# Altium PCB PCB_STM32F103C8.PcbDoc
Units mil, origin at the board's own origin, x right, y up, seen from the top; angles counter-clockwise.
Board outline 3937.01 x 3937.01 mil, 2 copper layers (Top Layer, Bottom Layer); 53 components, 63 nets, 231 pads, 105 vias.
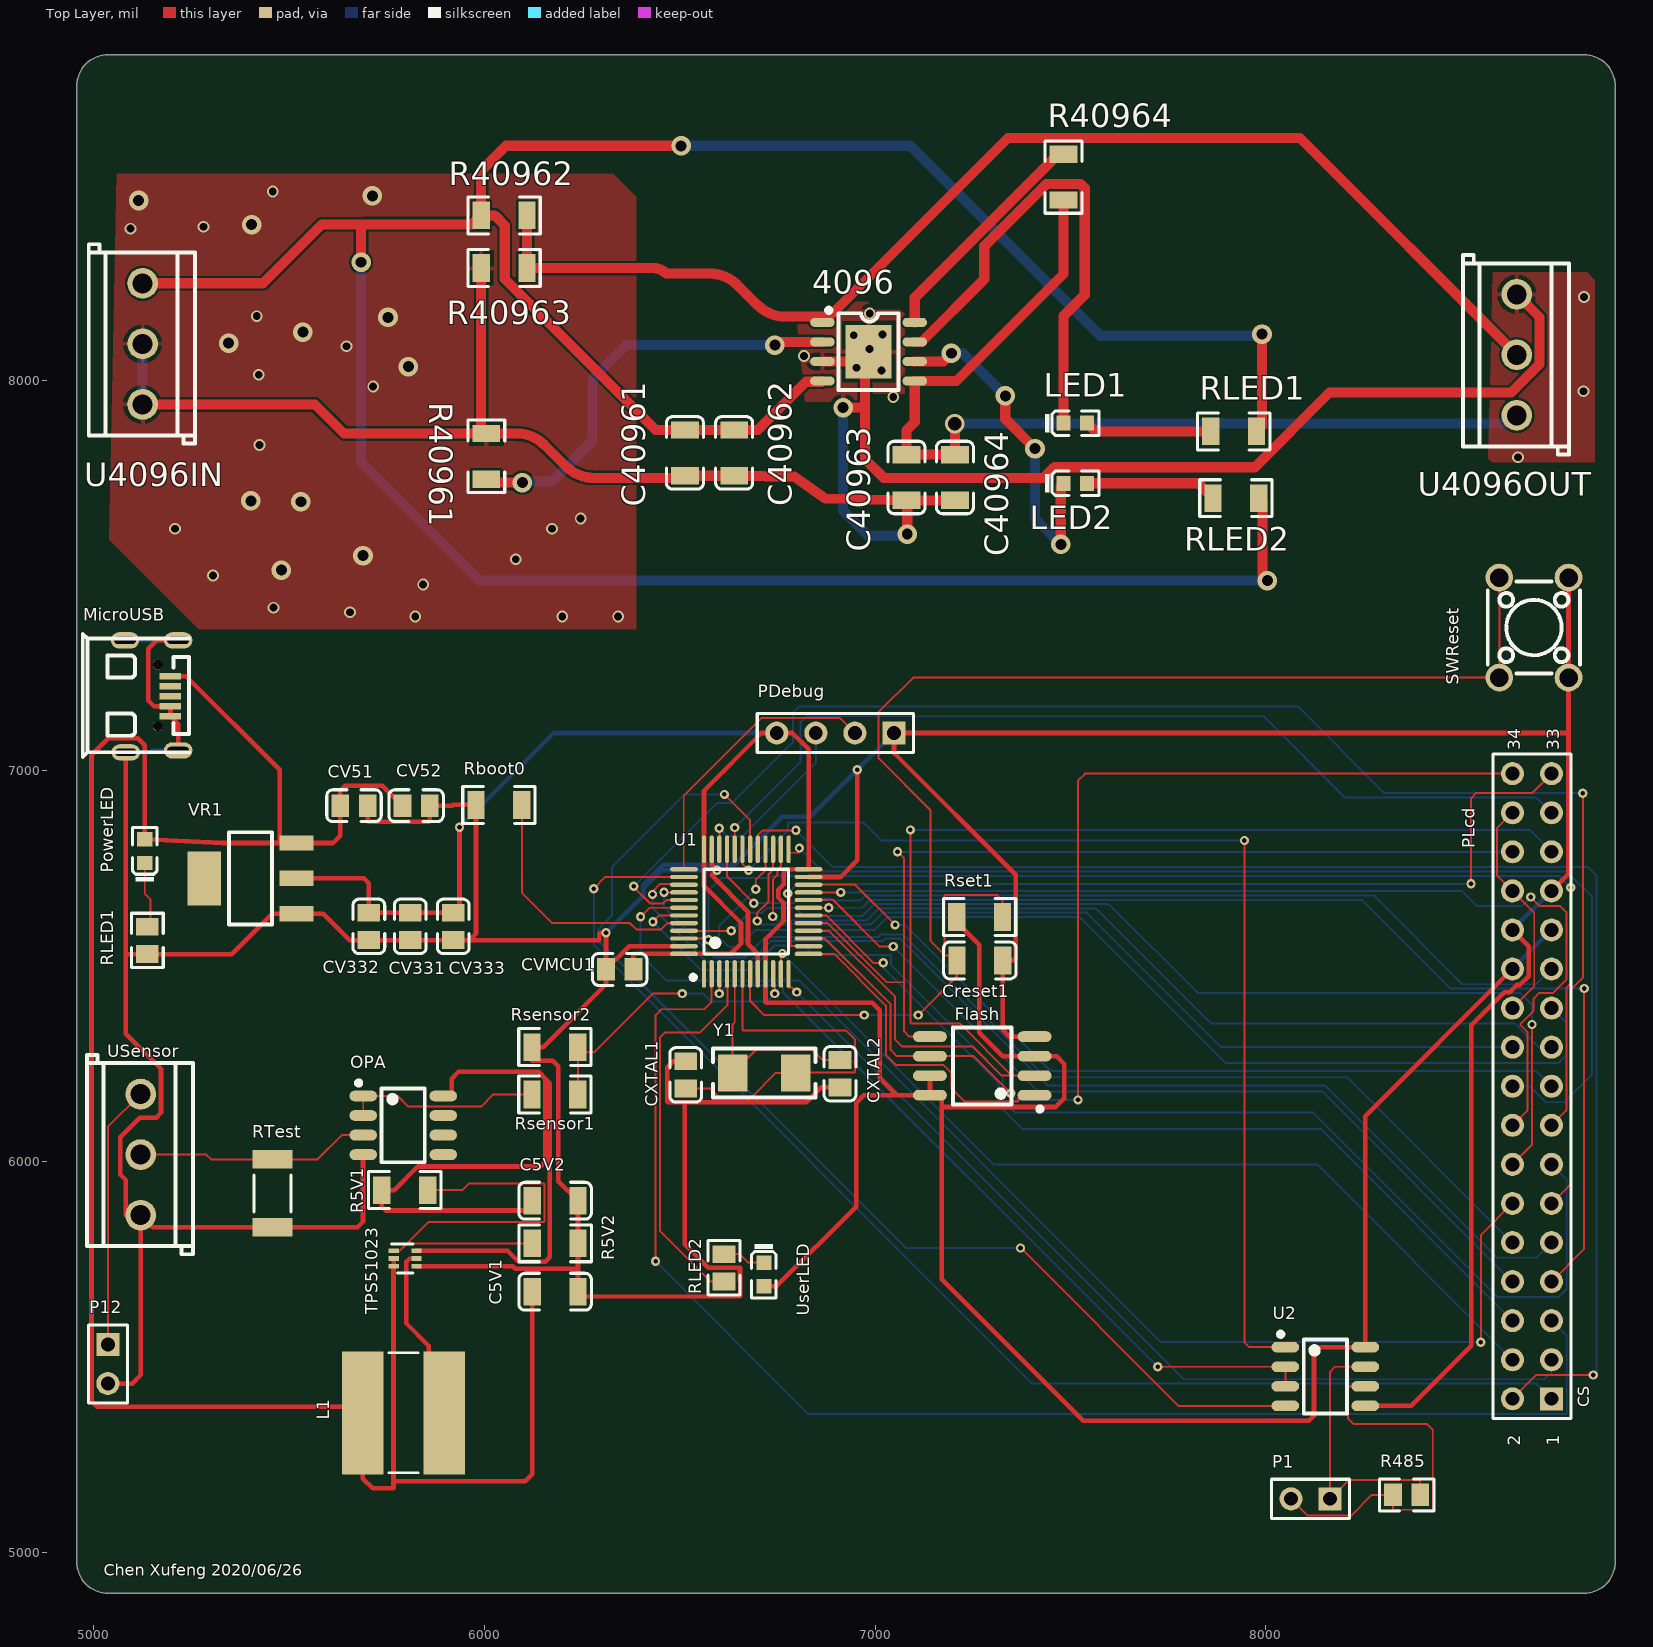
[diagram p0: Top Layer view]
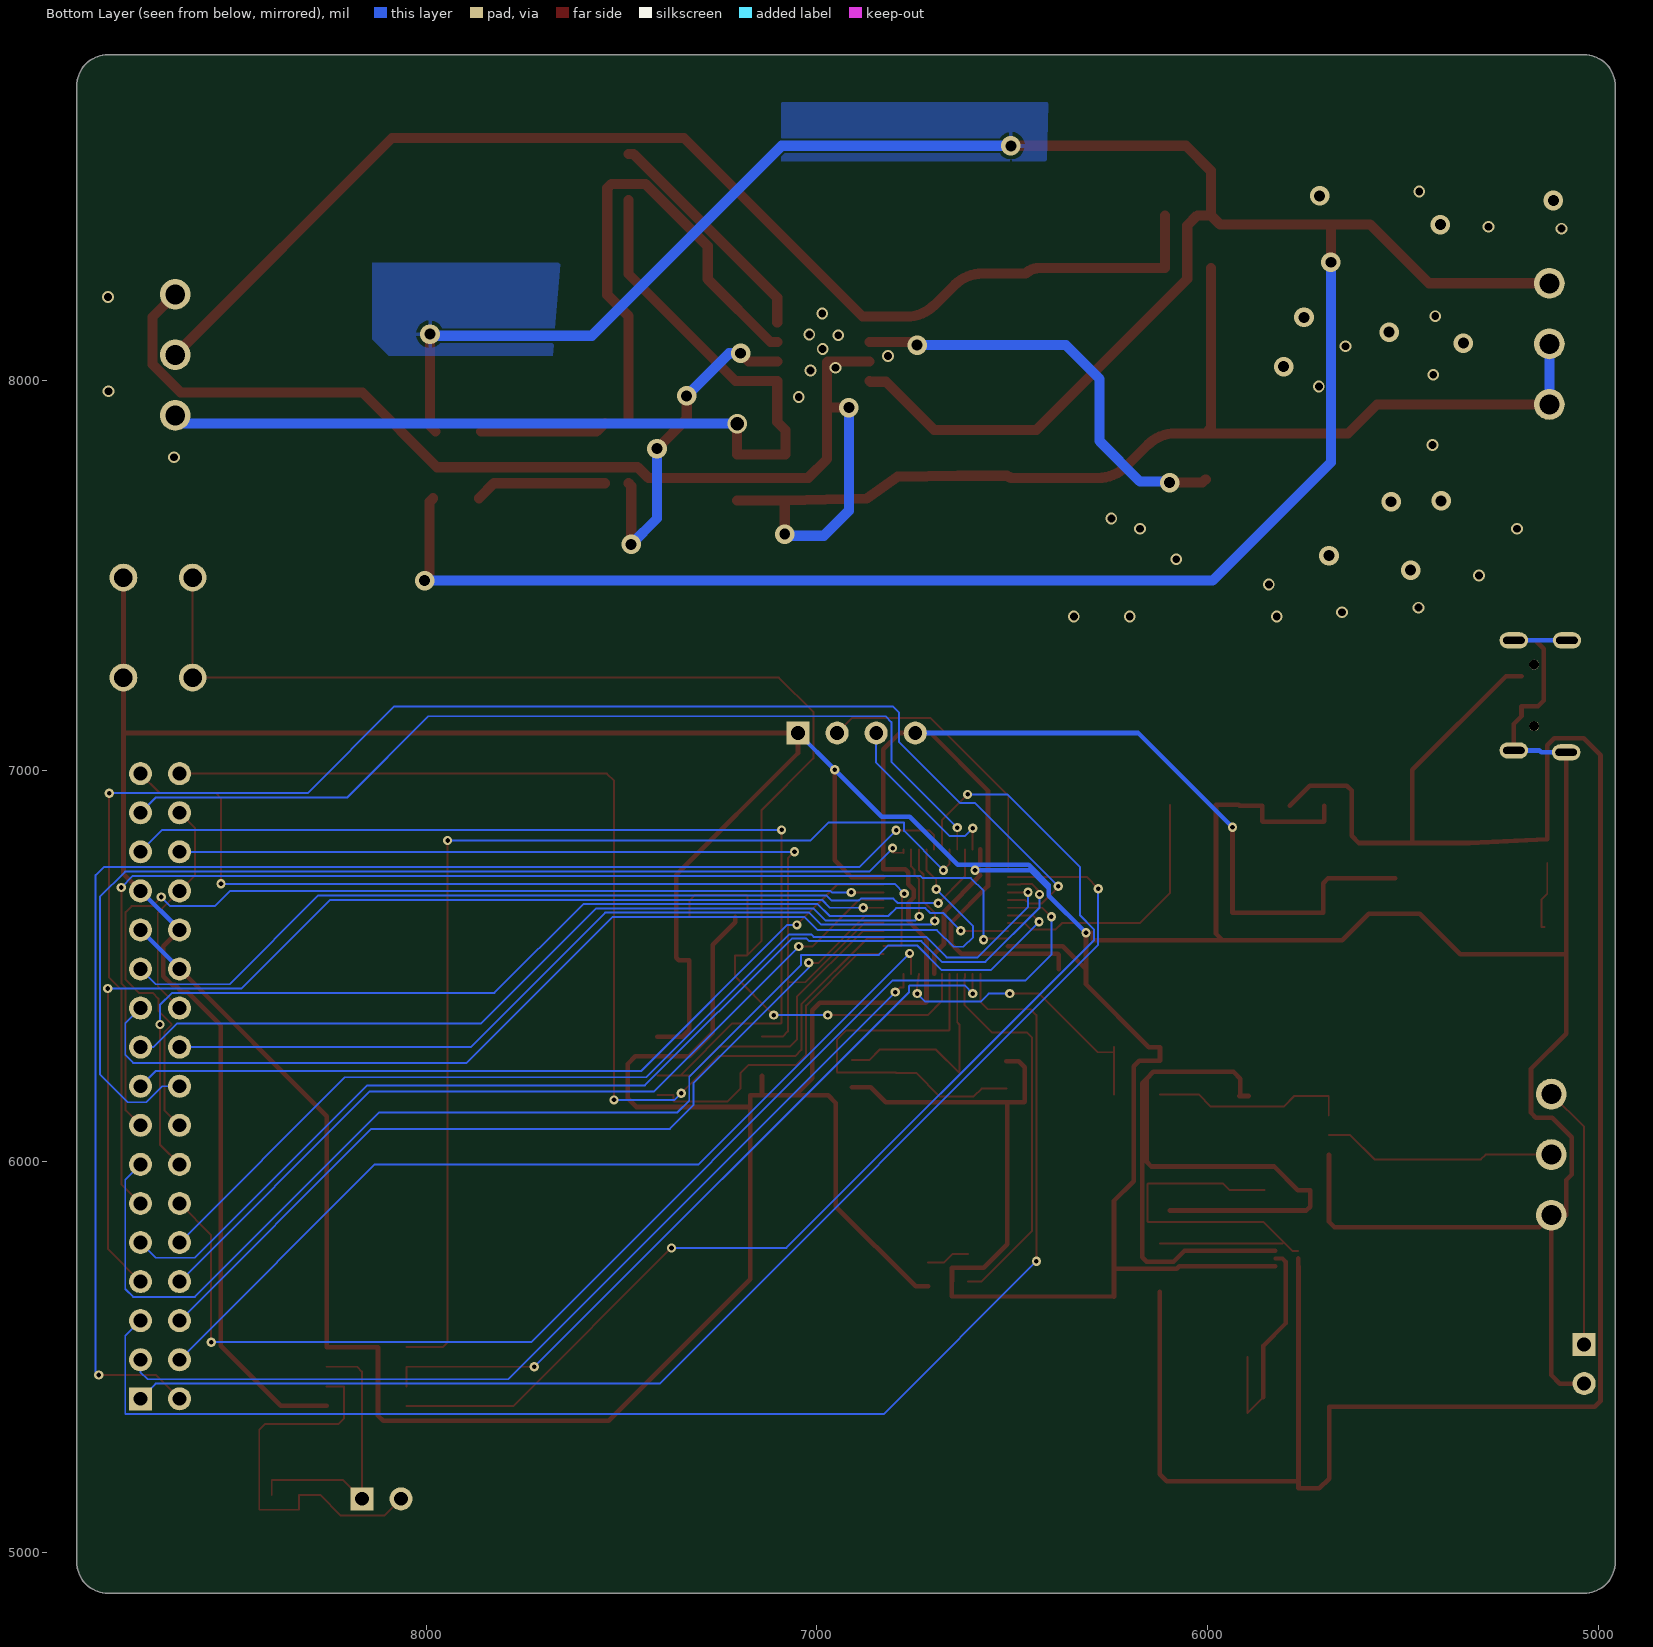
[diagram p1: Bottom Layer view, seen from below]
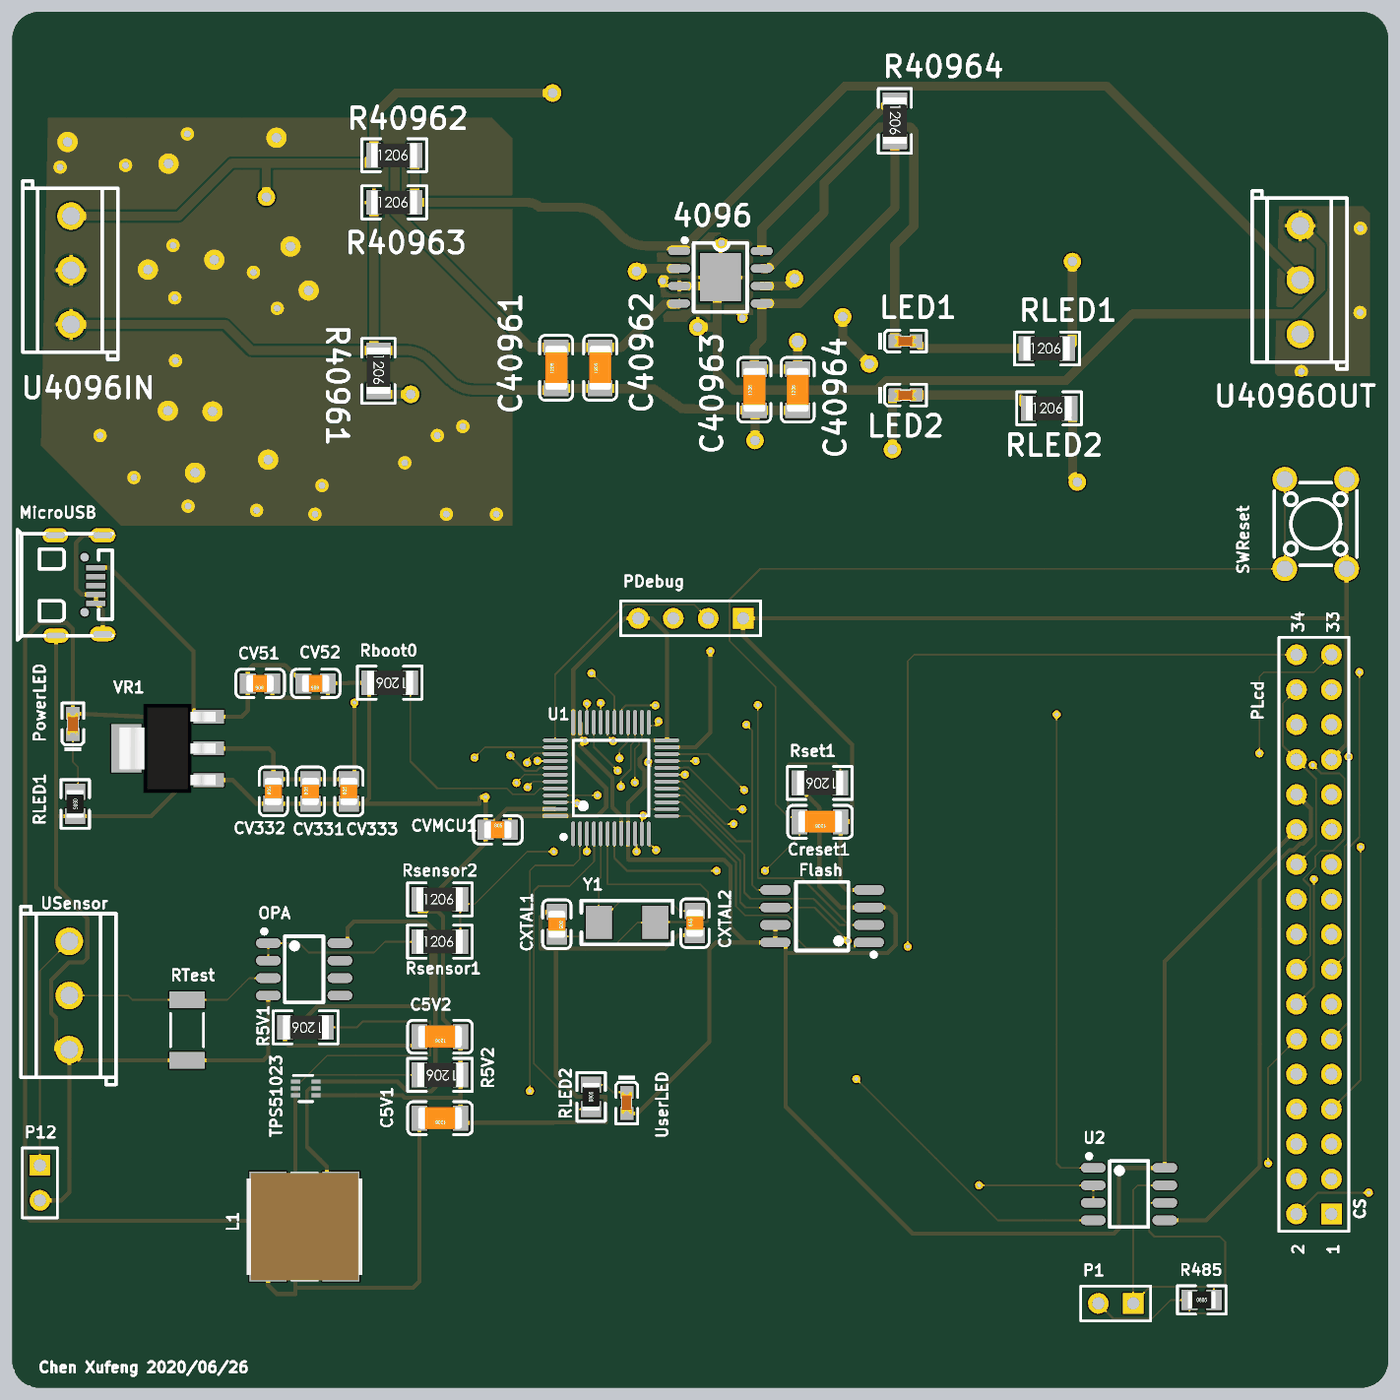
[diagram p2: 3D render of the assembled board from above, using the file's embedded part models]

## Layer stack, top to bottom
Top Solder: solder mask 0.4, Solder Resist, Dk 3.5
Top Layer: signal copper 1.4
Dielectric 1: dielectric 12.6, FR-4, Dk 4.8
Bottom Layer: signal copper 1.4
Bottom Solder: solder mask 0.4, Solder Resist, Dk 3.5

## Board outline
4956.74,4974.4 ccw(c5035.48,4974.4) 5035.48,4895.66 8815.01,4895.66 ccw(c8815.01,4974.4) 8893.75,4974.4 8893.75,8753.93 ccw(c8815.01,8753.93) 8815.01,8832.67 5035.48,8832.67 ccw(c5035.48,8753.93) 4956.74,8753.93

## Design rules (kind name [scope] priority, off if disabled: settings)
Clearance [All] p1: gap=6 ignorepadtopadclearanceinfootprint=FALSE
PolygonConnect [All] p1: connectstyle=Relief reliefconductorwidth=10 reliefentries=4 polygonreliefangle="90 Angle" airgapwidth=10
RoutingVias [All] p1: holewidth=11.81 width=23.62 viastyle="Through Hole" minholewidth=11.81 minwidth=23.62 maxholewidth=22.83 maxwidth=23.62
SolderMaskExpansion [All] p1: expansion=4
Width TC4056C [All] p1: maxlimit=31.5 minlimit=23.62 preferedwidth=25.98
Width Power [InNetClass('Power')] p2: maxlimit=39.37 minlimit=11.81 preferedwidth=11.81
Width [All] p3: maxlimit=50 minlimit=5 preferedwidth=5
30 further rules are at their usual default settings.

## Classes and differential pairs
net class "New Class": 4096_5V GND_4096 Net4096_2 Net4096_6 Net4096_7 Net4096_8
component class TC4056Charge: 4096 C40961 C40962 C40963 C40964 LED1 LED2 R40961 R40962 R40963 R40964 RLED1 RLED2 U4096IN U4096OUT
component class Sheet_STM32F103C8: Creset1 CV51 CV52 CV331 CV332 CV333 CVMCU1 CXTAL1 CXTAL2 Flash MicroUSB OPA P1 P12 PDebug PLcd PowerLED R485 Rboot0 RLED1 RLED2 Rsensor1 Rsensor2 Rset1 RTest SWReset U1 U2 USensor UserLED VR1 Y1
component class 3.3VTo5V: C5V1 C5V2 L1 R5V1 R5V2 TPS51023

## Components (designator, comment, footprint, x,y, rotation, side; value= is the part's Value field where it differs from the comment)
4096 "TC4056A" SOP-8_L4.9-W3.9-P1.27-LS6.0-BL-EP 6983,8073 r270 top
C5V1 "10uF (106) 10% 50V" 1206_C 6180.66,5667 r180 top
C5V2 "4.7uF (105) 10% 50V" 1206_C 6180.66,5900 r180 top
C40961 "1uF" 1206_C 6513,7814 r90 top
C40962 "0.1uF" 1206_C 6639,7814 r90 top
C40963 "0.1uF" 1206_C 7080,7751 r90 top
C40964 "0.1uF" 1206_C 7204,7751 r90 top
Creset1 "1uF" 1206_C 7268,6515 r180 top
CV51 "0.1uF 10% 50V" 0805_C 5665.96,6911 r180 top
CV52 "1uF 10% 50V" 0805_C 5824.96,6911 r180 top
CV331 "0.1uF 10% 50V" 0805_C 5810,6602.04 r90 top
CV332 "10uF 10% 50V" 0805_C 5704,6602.04 r90 top
CV333 "1uF 10% 50V" 0805_C 5920,6602.04 r90 top
CVMCU1 "4.7uF 10% 50V" 0805_C 6346.04,6492 r0 top
CXTAL1 "20pF 10% 50V" 0805_C 6515,6222 r270 top
CXTAL2 "20pF 10% 50V" 0805_C 6910,6225 r90 top
Flash "W25Q128JVSIQ" SOIC-8_208mil 7274,6245 r90 top
L1 "SDR0805-2R5ML" SDR0805 5793,5357 r0 top value=Value
LED1 "红灯 0603" 0603_LED_S1 7512,7890.11 r0 top
LED2 "蓝灯 0603" 0603_LED_S1 7512,7736.11 r0 top
MicroUSB "U254-051N-4BH806" MICRO-USB-SMD_U254-051N-4BH806 5148,7191 r270 top
OPA "LM358DR2G" SOIC-8_150mil 5792,6093 r270 top
P1 "Header 2" HDR1X2 8164.14,5137 r180 top
P12 "Header 2" HDR1X2 5036,5532 r270 top
PDebug "Header 4" HDR1X4 7048,7097 r180 top
PLcd "LCD" HDR2X17 8731,5393 r90 top
PowerLED "蓝灯 0603" 0603_LED_S1 5130.39,6794.68 r90 top
R5V1 "732KΩ (1001) ±1%" 1206_R 5796,5927 r180 top
R5V2 "100KΩ (1001) ±1%" 1206_R 6180.66,5791 r180 top
R485 "120ohm" 0805_R 8360,5147 r0 top
R40961 "2KΩ" 1206_R 6004.53,7805 r270 top
R40962 "0.1Ω" 1206_R 6050,8422 r0 top
R40963 "0.2Ω" 1206_R 6050,8287 r0 top
R40964 "1KΩ" 1206_R 7482,8520 r270 top
Rboot0 "100KΩ" 1206_R 6037,6913 r180 top
RLED1 "1KΩ" 1206_R 7917.34,7869 r0 top
RLED1 "100KΩ" 0805_R 5137,6566.04 r270 top
RLED2 "1KΩ" 1206_R 7923.34,7698 r0 top
RLED2 "330Ω" 0805_R 6613,5727.99 r90 top
Rsensor1 "17.4KΩ ±1%" 1206_R 6180.34,6172 r0 top
Rsensor2 "33KΩ  ±1%" 1206_R 6180.34,6293 r0 top
Rset1 "100KΩ" 1206_R 7267,6626 r180 top
RTest "250ohm ±0.1%" 12Z-2010 5457,5919 r90 top
SWReset "Key" SW-TH_4P-L6.0-W6.0-P4.50-LS6.5 8686,7367 r90 top
TPS51023 "TPS61023DRLR" DRL0006A 5797,5752 r0 top value=Value
U1 "STM32F103C8T6" LQFP-48_7x7x05P 6670,6640 r0 top
U2 "SIT485EESA" SOIC-8_150mil 8152,5450 r270 top
U4096IN "KF396-3.96-3P" CONN-TH_3P-P3.96_KF396-3.96-3P 5125,8093 r90 top
U4096OUT "KF396-3.96-3P" CONN-TH_3P-P3.96_KF396-3.96-3P 8642,8065 r90 top
USensor "KF396-3.96-3P" CONN-TH_3P-P3.96_KF396-3.96-3P 5120,6018 r90 top
UserLED "RED 0603" 0603_LED_S1 6715,5711 r270 top
VR1 "AMS1117-3.3" SOT-223 5401,6725 r0 top
Y1 "8MHz ±20ppm 20pF" SMD-5032_2P 6716,6227 r180 top

## Footprints (in the part's own frame and the unit in brackets; to place one, negate y for a bottom-side part, rotate by r counter-clockwise, add the part's x,y. Pads: shape width x height; smd on the part's side, far side on the other; paste and mask are expansions set on the pad)
12Z-2010 [mm] "Chip Resistor, Body 5.0x2.5mm, IPC High Density"
  rect 1.2x2.6 smd: 1(-2.2,0) 2(2.2,0)
  silkscreen extent -1.2,-1.2 1.2,1.2, body extent -2.58,-1.33 2.58,1.33, height 0.9
0603_LED_S1 [mm]
  rect 0.93x0.98 smd: A(0.77,0) K(-0.77,0)
  silkscreen extent -1.98,-0.79 1.54,0.79, body extent -0.8,-0.4 0.8,0.4, height 0.6
0805_C [mm]
  rect 1.16x1.47 smd: 1(-0.89,0) 2(0.89,0)
  silkscreen extent -1.77,-1.04 1.77,1.04, body extent -1,-0.62 1,0.63, height 0.77
0805_R [mm]
  rect 1.16x1.47 smd: 1(-0.89,0) 2(0.89,0)
  silkscreen extent -1.77,-1.03 1.77,1.03, body extent -1,-0.62 1,0.63, height 0.49
1206_C [mm]
  rect 1.13x1.8 smd: 1(-1.49,0) 2(1.49,0)
  silkscreen extent -2.36,-1.2 2.36,1.2, body extent -1.6,-0.81 1.6,0.79, height 1
1206_R [mm]
  rect 1.13x1.8 smd: 1(-1.49,0) 2(1.49,0)
  silkscreen extent -2.35,-1.2 2.35,1.2, body extent -1.7,-0.86 1.65,0.87, height 0.85
CONN-TH_3P-P3.96_KF396-3.96-3P [mm]
  round 2 hole 1.3: 1(-3.937,0) 2(0,0) 3(3.937,0)
  silkscreen extent -6.48,-3.4 6.48,3.5
DRL0006A [mm]
  rect 0.67x0.3 smd paste+0 mask+0: 1(-0.74,0.5) 2(-0.74,0) 3(-0.74,-0.5) 4(0.74,-0.5) 5(0.74,0) 6(0.74,0.5)
  silkscreen extent -0.9,-0.95 0.5,0.95, body extent 0,0 0.25,0.25, height 0.25
HDR1X2 [mm] "Connector; Header; 2 Position"
  rect 1.5x1.5 hole 0.9: 1(0,0)
  round 1.5 hole 0.9: 2(2.54,0)
  silkscreen extent -1.27,-1.27 3.81,1.27
HDR1X4 [mm] "Connector; Header; 4 Position"
  rect 1.5x1.5 hole 0.9: 1(0,0)
  round 1.5 hole 0.9: 2(2.54,0) 3(5.08,0) 4(7.62,0)
  silkscreen extent -1.27,-1.27 8.89,1.27
HDR2X17 [mm] "Connector; Header; 17x2 Position"
  rect 1.5x1.5 hole 0.9: 1(0,0)
  round 1.5 hole 0.9: 2(0,2.54) 3(2.54,0) 4(2.54,2.54) 5(5.08,0) 6(5.08,2.54) 7(7.62,0) 8(7.62,2.54) 9(10.16,0) 10(10.16,2.54) 11(12.7,0) 12(12.7,2.54) 13(15.24,0) 14(15.24,2.54) 15(17.78,0) 16(17.78,2.54) 17(20.32,0) 18(20.32,2.54) 19(22.86,0) 20(22.86,2.54) 21(25.4,0) 22(25.4,2.54) 23(27.94,0) 24(27.94,2.54) 25(30.48,0) 26(30.48,2.54) 27(33.02,0) 28(33.02,2.54) 29(35.56,0) 30(35.56,2.54) 31(38.1,0) 32(38.1,2.54) 33(40.64,0) 34(40.64,2.54)
  silkscreen extent -1.27,-1.27 41.91,3.81
LQFP-48_7x7x05P [mm]
  oval 0.28x1.8 smd mask+0.051: 1(-2.75,-4.05) 2(-2.25,-4.05) 3(-1.75,-4.05) 4(-1.25,-4.05) 5(-0.75,-4.05) 6(-0.25,-4.05) 7(0.25,-4.05) 8(0.75,-4.05) 9(1.25,-4.05) 10(1.75,-4.05) 11(2.25,-4.05) 12(2.75,-4.05) 25(2.75,4.05) 26(2.25,4.05) 27(1.75,4.05) 28(1.25,4.05) 29(0.75,4.05) 30(0.25,4.05) 31(-0.25,4.05) 32(-0.75,4.05) 33(-1.25,4.05) 34(-1.75,4.05) 35(-2.25,4.05) 36(-2.75,4.05)
  oval 1.8x0.28 smd mask+0.051: 13(4.05,-2.75) 14(4.05,-2.25) 15(4.05,-1.75) 16(4.05,-1.25) 17(4.05,-0.75) 18(4.05,-0.25) 19(4.05,0.25) 20(4.05,0.75) 21(4.05,1.25) 22(4.05,1.75) 23(4.05,2.25) 24(4.05,2.75) 37(-4.05,2.75) 38(-4.05,2.25) 39(-4.05,1.75) 40(-4.05,1.25) 41(-4.05,0.75) 42(-4.05,0.25) 43(-4.05,-0.25) 44(-4.05,-0.75) 45(-4.05,-1.25) 46(-4.05,-1.75) 47(-4.05,-2.25) 48(-4.05,-2.75)
  silkscreen extent -3.6,-4.42 2.75,2.75
MICRO-USB-SMD_U254-051N-4BH806 [mm]
  rect 0.4x1.4 smd: 1(-1.3,1.225) 2(-0.65,1.225) 3(0,1.225) 4(0.65,1.225) 5(1.3,1.225)
  oval 1.05x1.849 hole 0.45 slot 1.4 at 90 deg: 6(-3.64,1.725) 7(-3.64,-1.725) 8(3.52,1.725) 9(3.64,-1.675)
  round 0.65 hole 0.65 unplated: ""(-2.06,0.405) ""(1.94,0.405)
  silkscreen extent -4.06,-4.48 3.94,2.42
SDR0805 [mil]
  rect 106.5x315 smd: 1(-104.25,0) 2(104.25,0)
  silkscreen extent -38,-154 38,154, body extent -166,-154 166,154, height 221
SMD-5032_2P [mm]
  rect 1.9x2.4 smd: 1(-2.05,0) 2(2.05,0)
  silkscreen extent -3.33,-1.6 3.33,1.6
SOIC-8_150mil [mm]
  oval 0.7x1.8 smd: 1(-1.905,-2.6) 2(-0.635,-2.6) 3(0.635,-2.6) 4(1.905,-2.6) 5(1.905,2.6) 6(0.635,2.6) 7(-0.635,2.6) 8(-1.905,2.6)
  silkscreen extent -2.9,-3.05 2.4,1.4
SOIC-8_208mil [mm]
  oval 0.7x2.2 smd: 1(-1.905,-3.4) 2(-0.635,-3.4) 3(0.635,-3.4) 4(1.905,-3.4) 5(1.905,3.4) 6(0.635,3.4) 7(-0.635,3.4) 8(-1.905,3.4)
  silkscreen extent -2.95,-3.9 2.5,1.9
SOP-8_L4.9-W3.9-P1.27-LS6.0-BL-EP [mm]
  oval 0.6x1.598 smd: 1(-1.905,-3) 2(-0.635,-3) 3(0.635,-3) 4(1.905,-3) 5(1.905,3) 6(0.635,3) 7(-0.635,3) 8(-1.905,3)
  rect 3.5x3 smd: 9(0,0)
  silkscreen extent -2.84,-2.74 2.5,1.95
SOT-223 [mm]
  rect 2.2x1 smd: 1(3,-2.3) 2(3,0) 3(3,2.3)
  rect 2.2x3.5 smd: 2(-3,0)
  silkscreen extent -1.4,-3 1.4,3, body extent -3.49,-3.24 3.49,3.24, height 1.64
SW-TH_4P-L6.0-W6.0-P4.50-LS6.5 [mm]
  round 1.8 hole 1.2: 1(-3.25,2.25) 2(3.25,2.25) 3(-3.25,-2.25) 4(3.25,-2.25)
  silkscreen extent -3,-3 3,3

## Part data
4096: BOM_LCSC Assembly=Yes, BOM_Manufacturer=FM, BOM_Manufacturer Part=TC4056A, BOM_Supplier=LCSC, BOM_Supplier Part=C84051, SMT Type=Extend, spicePre=U, spiceSymbolName=TC4056A
C5V1: library part "1206 10uF (106) 10% 50V", "贴片电容", Package=1206, SuppliersPartNumber=C13585, ComponentLink1Description=供应商链接, ComponentLink1URL=http://www.szlcsc.com/product/details_14236.html, Supplier=LC
C5V2 C40961 C40962 C40963 C40964: library part "1206 1uF (105) 10% 50V", "贴片电容", Package=1206, SuppliersPartNumber=C1848, ComponentLink1Description=供应商链接, ComponentLink1URL=http://www.szlcsc.com/product/details_2200.html, Supplier=LC
Creset1: library part "1206 1nF (102) 10% 500V", "贴片电容", Package=1206, SuppliersPartNumber=C35216, ComponentLink1Description=供应商链接, ComponentLink1URL=http://www.szlcsc.com/product/details_36187.html, Supplier=LC
CV51 CV52 CV331 CV332 CV333 CVMCU1: library part "0805 4.7uF (475) 10% 25V", "贴片电容", Package=0805, SuppliersPartNumber=C1779, ComponentLink1Description=供应商链接, ComponentLink1URL=http://www.szlcsc.com/product/details_2131.html, Supplier=LC
CXTAL1 CXTAL2: library part "0805 1uF (105) 10% 50V", "贴片电容", Package=0805, SuppliersPartNumber=C28323, ComponentLink1Description=供应商链接, ComponentLink1URL=http://www.szlcsc.com/product/details_29074.html, Supplier=LC
Flash: library part W25Q128FVSIGTR_[C110643], "Flash ROM", Package=SOIC-8, SuppliersPartNumber=C113767, ComponentLink1Description=供应商链接, ComponentLink1URL=http://www.szlcsc.com/product/details_111868.html, Supplier=LC
L1: "Imported", Manufacturer_Name=Bourns, Manufacturer_Part_Number=SDR0805-2R5ML, RefDes=RefDes, Type=DEV, Vendor=Bourns
LED1: library part "0603 红灯", "发光二极管", Package=0603, SuppliersPartNumber=C2286, ComponentLink1Description=供应商链接, ComponentLink1URL=http://www.szlcsc.com/product/details_2659.html, Supplier=LC
LED2 PowerLED UserLED: library part "0603 蓝灯", "发光二极管", Package=0603, SuppliersPartNumber=C72041, ComponentLink1Description=供应商链接, ComponentLink1URL=http://www.szlcsc.com/product/details_73150.html, Supplier=LC
MicroUSB: "microUSB", BOM_Manufacturer="XKB Enterprise", BOM_Manufacturer Part=U254-051N-4BH806, BOM_Supplier=LCSC, BOM_Supplier Part=C319170, Contributor=LCSC, spicePre=U, spiceSymbolName=U254-051N-4BH806
OPA: library part LM358DR2G_[C7950], "通用运放", Package=SOIC-8, SuppliersPartNumber=C7950, ComponentLink1Description=供应商链接, ComponentLink1URL=http://www.szlcsc.com/product/details_8427.html, Supplier=LC
P1 P12: "Header, 2-Pin", LatestRevisionDate=17-Jul-2002, LatestRevisionNote="Re-released for DXP Platform.", Publisher="Altium Limited"
PDebug: "Header, 4-Pin", LatestRevisionDate=17-Jul-2002, LatestRevisionNote="Re-released for DXP Platform.", Publisher="Altium Limited"
PLcd: library part "Header 17X2", "Header, 17-Pin, Dual row", LatestRevisionDate=17-Jul-2002, LatestRevisionNote="Re-released for DXP Platform.", Publisher="Altium Limited"
R5V1 R5V2 Rboot0 Rsensor1 Rsensor2 Rset1: library part "1206 1KΩ (1001) 1%", "贴片电阻", Package=1206, SuppliersPartNumber=C4410, ComponentLink1Description=供应商链接, ComponentLink1URL=http://www.szlcsc.com/product/details_4817.html, Supplier=LC
R485: library part "0805 3KΩ (3001) 1%", "贴片电阻", Package=0805, SuppliersPartNumber=C17661, ComponentLink1Description=供应商链接, ComponentLink1URL=http://www.szlcsc.com/product/details_18349.html, Supplier=LC
R40961 R40962 R40963 R40964 RLED1 RLED2: library part "1206 0.1Ω (R100) 1%", "贴片电阻", Package=1206, SuppliersPartNumber=C25334, ComponentLink1Description=供应商链接, ComponentLink1URL=http://www.szlcsc.com/product/details_26077.html, Supplier=LC
RLED1 RLED2: library part "0805 2KΩ (2001) 1%", "贴片电阻", Package=0805, SuppliersPartNumber=C17604, ComponentLink1Description=供应商链接, ComponentLink1URL=http://www.szlcsc.com/product/details_18292.html, Supplier=LC
RTest: library part "0402 0Ω (0R0) 1%", "贴片电阻", Package=0402, SuppliersPartNumber=C17168, ComponentLink1Description=供应商链接, ComponentLink1URL=http://www.szlcsc.com/product/details_17853.html, Supplier=LC
SWReset: BOM_Manufacturer="SHOU HAN", BOM_Manufacturer Part=TS665CJ, BOM_Supplier=LCSC, BOM_Supplier Part=C393938, Contributor=LCSC, spicePre=S, spiceSymbolName=TS665CJ
TPS51023: "Imported", Manufacturer="Texas Instruments", PartNumber=TPS61023DRL, Manufacturer_Name="Texas Instruments", Manufacturer_Part_Number=TPS61023DRLR, RefDes=RefDes, Type=DEV
U1: "ARM", Package=LQFP-48_7x7x05P, SuppliersPartNumber=C8734, ComponentLink1Description=供应商链接, ComponentLink1URL=http://www.szlcsc.com/product/details_9243.html, Supplier=LC
U2: library part SP485EEN-L/TR_[C6855], "RS-485/RS-422", Package=SOIC-8, SuppliersPartNumber=C6855, ComponentLink1Description=供应商链接, ComponentLink1URL=http://www.szlcsc.com/product/details_7327.html, Supplier=LC
U4096IN U4096OUT USensor: BOM_Manufacturer="Cixi Kefa Elec", BOM_Manufacturer Part=KF396-3.96-3P, BOM_Supplier=LCSC, BOM_Supplier Part=C474895, Contributor=LCSC, spicePre=U, spiceSymbolName=KF396-3.96-3P
VR1: library part "SOT-223 AMS1117-3.3", "低压差线性稳压(LDO)", Package=SOT-223, SuppliersPartNumber=C6186, ComponentLink1Description=供应商链接, ComponentLink1URL=http://www.szlcsc.com/product/details_6652.html, Supplier=LC
Y1: library part "SMD-5032_2P 8MHz 20ppm 20pF", "贴片晶振", Package=SMD-5032_2P, SuppliersPartNumber=C115962, ComponentLink1Description=供应商链接, ComponentLink1URL=http://www.szlcsc.com/product/details_117214.html, Supplier=LC

## Via types
v1: diameter 23.62, hole 11.81, Top Layer to Bottom Layer, 51 vias
v2: diameter 30, hole 20, Top Layer to Bottom Layer, 30 vias
v3: diameter 50, hole 28, Top Layer to Bottom Layer, 23 vias
v4: diameter 50, hole 35, Top Layer to Bottom Layer, 1 vias

## Nets (pads, with @x,y where several pads share a name; then routed paths per layer and width w, separated by ;. In a path a pad name is that pad's centre, name@x,y a point inside that pad or via, vN(x,y) a via of type N, cw(c..) or ccw(c..) an arc to the next point about the centre after c; other vN are vias at no path point)
5V: C5V1.2 CV51.2 CV52.2 L1.1 MicroUSB.1 PowerLED.A TPS51023.2 TPS51023.3 VR1.3 | length 5817.8
  Top Layer w11.81: MicroUSB.1 5236,7242.18 5475.5,7002.68 5475.5,6815.55 ; 5767,5187.5 5767,5732.32 TPS51023.3 TPS51023.2 ; CV52.2 5738.42,6962.5 5643.42,6962.5 5630.92,6950 CV51.2 5630.92,6833.97 5612.5,6815.55 VR1.3 5475.5,6815.55 ; C5V1.2 6122,5200 6104,5182 5767,5182 5767,5164 5713.5,5164 5688.75,5188.75 L1.1 5688.75,5373 5008.5,5373 4994,5387.5 4994,7040.5 5037.5,7084 5112.5,7084 5130.39,7066.11 PowerLED.A 5329.45,6815.55 5475.5,6815.55
5VStable: C5V2.2 OPA.8 R5V1.2 TPS51023.6 | length 2210.8
  Top Layer w11.81: TPS51023.6 6058.97,5771.69 6087,5743.66 6156,5743.66 6167.41,5755.07 6167.41,6201.09 6156,6212.5 ; OPA.8 OPA.8@5916,6168 ; OPA.8@5919,6168 OPA.8@5916,6168 ; 6097,5875 5747,5875 5737.34,5884.66 R5V1.2 5769,5927 5829.5,5987.5 6143.5,5987.5 6156,6000 6156,6212.5 ; OPA.8@5916,6168 5916,6212.5 5933.5,6230 6138.5,6230 6156,6212.5
4096_5V: 4096.4 C40961.2 C40962.2 R40962.1 RLED1.2@7976,7869 RLED2.2@7982,7698 U4096IN.3 | length 8045
  Top Layer w25.98: U4096IN.3 5433,8248 5584,8399 5688,8399 ; v3(5684,8302) 5684,8395 5688,8399 ; v3(6503,8600) 6055,8600 5991.34,8536.34 R40962.1 ; 4096.4 6862.89,7996 6823,7996 6699.66,7872.66 C40962.2 C40961.2 6438.46,7872.66 6052,8259.13 6052,8396 6026,8422 R40962.1 ; RLED1.2@7976,7869 7990,7883 v3(7990,8118) ; RLED2.2@7982,7698 7991,7689 7991,7500 v3(8004,7487) ; 5688,8399 5968.34,8399 R40962.1
  Bottom Layer w25.98: v3(5684,8302) 5684,7790 5987,7487 v3(8004,7487) ; v3(6503,8600) 7090,8600 7576,8114 7986,8114 v3(7990,8118)
ADC: Rsensor1.2 Rsensor2.2 U1.10 | length 754.8
  Top Layer w5: Rsensor1.2 Rsensor2.2@6239,6280 ; Rsensor2.2 Rsensor2.2@6239,6280 ; v1(6506,6430) 6431,6430 6281,6280 Rsensor2.2@6239,6280 ; U1.10 6743,6446.9 v1(6743,6430)
  Bottom Layer w5: v1(6506,6430) 6560.38,6430 6580.69,6409.69 6722.69,6409.69 v1(6743,6430)
BAT: 4096.5 C40963.2 C40964.2 R40964.2 U4096OUT.1 | length 2530.8
  Top Layer w25.98: v4(7204,7889) C40964.2 C40963.2 7080,7872 7101.11,7893.11 4096.5 7208,7998 7482,8272 R40964.2
  Bottom Layer w25.98: v4(7204,7889) 8621,7889 U4096OUT.1
BL: PLcd.23 U1.33 | length 2330.7
  Top Layer w5: U1.33 6620.79,6729.8 v1(6689.09,6661.5)
  Bottom Layer w5: v1(6689.09,6661.5) 6792.12,6661.5 6804.04,6673.42 6886.97,6673.42 6891.95,6668.44 6962.92,6668.44 6975.69,6681.21 8275.79,6681.21 8503,6454 8692,6454 PLcd.23
BOOT0: Rboot0.1 U1.44 | length 685.9
  Top Layer w5: Rboot0.1 6095.66,6688 6173.19,6610.47 6372.38,6610.47 6389.16,6593.69 6451.13,6593.69 6467.91,6610.47 U1.44
CLK: Flash.6 PLcd.34 U1.15 | length 2865.8
  Top Layer w5: U1.15 6871.16,6571.1 7039.19,6403.08 7039.19,6285.88 7055.07,6270 Flash.6 7252,6270 v1(7347,6175) ; v1(7519,6158) 7519,6975 7537,6993 PLcd.34
  Bottom Layer w5: v1(7347,6175) 7364,6158 v1(7519,6158)
CS: PLcd.1 U1.38 | length 3319.7
  Top Layer w5: v1(6279.69,6698.69) 6309.58,6728.58 U1.38
  Bottom Layer w5: v1(6279.69,6698.69) 6279.69,6554.69 7402.38,5432 8692,5432 PLcd.1
DB0: PLcd.6 U1.18 | length 2271.8
  Top Layer w5: U1.18 6874.29,6630.16 6995.52,6508.92 v1(7020.52,6508.92)
  Bottom Layer w5: v1(7020.52,6508.92) 7020.52,6496.42 7315.1,6201.84 7315.1,6145 7376.1,6084 8140,6084 PLcd.6
DB1: PLcd.7 U1.19 | length 2872.2
  Top Layer w5: U1.19 v1(6881.28,6649.84) ; PLcd.7 8814.5,5776.5 v1(8814.5,6443)
  Bottom Layer w5: v1(6881.28,6649.84) 6966.32,6649.84 6986.69,6670.21 8245.79,6670.21 8473,6443 v1(8814.5,6443)
DB2: PLcd.8 U1.20 | length 2206.7
  Top Layer w5: U1.20 6876,6669.53 6876.78,6670.31 6891.95,6670.31 7011.77,6550.5 v1(7046,6550.5)
  Bottom Layer w5: v1(7046,6550.5) 7416.58,6179.92 8144.08,6179.92 PLcd.8
DB3: PLcd.9 U1.39 | length 2869.4
  Top Layer w5: v1(6430,6684) 6430,6691 6450,6711 6478,6711 6478,6708.9 U1.39
  Bottom Layer w5: v1(6430,6684) 6430,6650 6568.58,6511.42 6679.6,6511.42 6732.5,6564.31 7019.19,6564.31 7025.69,6570.81 7064,6570.81 7439.81,6195 8151,6195 8592,5754 8692,5754 PLcd.9
DB4: PLcd.10 U1.40 | length 2665
  Top Layer w5: v1(6459.5,6689.21) U1.40
  Bottom Layer w5: v1(6459.5,6689.21) 6459.5,6651.32 6588.19,6522.63 6667.5,6522.63 6720.19,6575.31 7008.19,6575.31 7014.69,6581.81 7070.5,6581.81 7436.31,6216 8208,6216 PLcd.10
DB5: PLcd.11 U1.41 | length 3990.8
  Top Layer w5: v1(6382,6705) 6382,6702.57 6423.57,6661 6457.47,6661 6466,6669.53 U1.41 ; PLcd.11 8780.03,5942.03 8780.03,6440.19 8811,6471.16 v1(8811,6943)
  Bottom Layer w5: v1(6382,6705) 6595.19,6918.19 6634,6918.19 6790,7074.19 6790,7150 6805,7165 8081,7165 8303,6943 v1(8811,6943)
DB6: PLcd.12 U1.42 | length 3167.3
  Top Layer w5: v1(6399.5,6626.5) 6422.84,6649.84 U1.42 ; v1(8550,5538) 8550,5812 PLcd.12
  Bottom Layer w5: v1(6399.5,6626.5) 6399.5,6529.78 6465.29,6464 6805,6464 7731,5538 v1(8550,5538)
DB7: PLcd.13 U1.43 | length 3269.4
  Top Layer w5: v1(6431,6614) 6447.16,6630.16 U1.43
  Bottom Layer w5: v1(6431,6614) 6555,6490 6680.19,6490 6743.5,6553.31 6817.23,6553.31 6841.31,6529.23 7039.6,6529.23 7040.84,6528 7040.84,6502.61 7326.43,6217.01 7326.43,6155.95 7356.52,6125.86 8120.14,6125.86 8592,5654 8750,5654 8770,5674 8770,5954 PLcd.13
DB8: PLcd.14 U1.45 | length 2751.3
  Top Layer w5: U1.45 v1(6631.35,6590.79) ; PLcd.14 8681,6043 v1(8681,6351)
  Bottom Layer w5: v1(6631.35,6590.79) 6676.91,6636.35 6709.19,6636.35 6721.83,6649 6797,6649 6817.29,6628.71 6967.19,6628.71 6997.69,6659.21 7597.79,6659.21 7825,6432 8650,6432 8681,6401 v1(8681,6351)
DB9: PLcd.15 U1.46 | length 3052.8
  Top Layer w5: U1.46 6569.9,6571.1 v1(6573,6568) ; PLcd.15 8769.03,6131.03 8769.03,6445.03 8780.03,6456.03 v1(8780.03,6701.5)
  Bottom Layer w5: v1(6573,6568) 6573,6693 6605.69,6725.69 6729.06,6725.69 6734.69,6731.31 8750.22,6731.31 v1(8780.03,6701.5)
DB10: PLcd.16 U1.21 | length 2621.4
  Top Layer w5: U1.21 6911.79,6689.21 v1(6912,6689) ; PLcd.16 8670,6132 8670,6331 8651,6350 8651,6352 8685,6386 8685,6417 8700,6432 8735,6432 8769.03,6466.03 8769.03,6638.47 8753.5,6654 8701,6654 v1(8677.75,6677.25)
  Bottom Layer w5: v1(6912,6689) 6961.48,6689 6964.69,6692.21 8502.46,6692.21 8540.67,6654 8654.5,6654 v1(8677.75,6677.25)
DB11: PLcd.17 U1.22 | length 2115.6
  Top Layer w5: U1.22 6897.59,6708.9 6898,6709.31 6947.59,6709.31 v1(7051,6605.9)
  Bottom Layer w5: v1(7051,6605.9) 7075.23,6605.9 7449.12,6232 8692,6232 PLcd.17
DB12: PLcd.18 U1.25 | length 2833.7
  Top Layer w5: U1.25 6778.27,6790 6778.61,6790.01 6806,6791 v1(6806,6802.5)
  Bottom Layer w5: v1(6806,6802.5) 6866.19,6742.31 8770.32,6742.31 8834.81,6677.82 8834.81,6223.81 8763,6152 8716,6152 8675,6193 PLcd.18
DB13: PLcd.19 U1.26 | length 2337.5
  Top Layer w5: v1(6737.88,6627.5) 6737.88,6722.78 6750.5,6735.41 6750.5,6747.53 6758.58,6755.61 U1.26
  Bottom Layer w5: v1(6737.88,6627.5) 6747.67,6617.71 6978.19,6617.71 7008.69,6648.21 7564.73,6648.21 7858.94,6354 8637.38,6354 8698.38,6293 PLcd.19
DB14: PLcd.20 U1.27 | length 2292.4
  Top Layer w5: v1(6698,6616) 6698,6636.62 6726.88,6665.5 6726.88,6734.91 6738.9,6746.93 U1.27
  Bottom Layer w5: v1(6698,6616) 6707.29,6606.71 6989.19,6606.71 7019.69,6637.21 7541.79,6637.21 7886,6293 PLcd.20
DB15: PLcd.21 U1.28 | length 2784.9
  Top Layer w5: v1(6694.21,6697) 6694.21,6720.91 6719.21,6745.91 U1.28
  Bottom Layer w5: v1(6694.21,6697) 6600,6602.79 6600,6574.86 6624.86,6550 6649.86,6550 6692.55,6592.7 6998,6592.7 7031.52,6626.21 7522.79,6626.21 7896,6253 8750,6253 8770,6273 8770,6354 PLcd.21
F_CS: Flash.1 U1.13 | length 846.3
  Top Layer w5: U1.13 6894.68,6531.73 7027.07,6399.34 7027.07,6273.93 7054,6247 7175,6247 7195,6227 7195,6187.5 7228.12,6154.38 7366,6154.38 7367.05,6155.43 7367.05,6170 Flash.1
GND: C5V1.1 C5V2.1 Creset1.1 CV51.1 CV52.1 CV331.1 CV332.1 CV333.1 CVMCU1.1 CXTAL1.1 CXTAL2.1 Flash.4 MicroUSB.4 MicroUSB.5 MicroUSB.6 MicroUSB.7 MicroUSB.8 MicroUSB.9 OPA.4 P12.2 PDebug.1 PLcd.26 PLcd.27 R5V2.1 Rboot0.2 RLED1.2@5137,6531 Rsensor2.1 RTest.1 SWReset.3 SWReset.4 TPS51023.4 U1.8 U1.23 U1.35 U1.47 U2.5 USensor.1 VR1.1 | length 15793
  Top Layer w11.81: P12.2 5098,5432 5120,5454 USensor.1 ; MicroUSB.9 5082.05,6529 ; MicroUSB.8 5215.91,7120.14 MicroUSB.5 MicroUSB.4 5154,7165.41 5139.24,7180.17 5139.24,7312.5 5161.05,7334.31 MicroUSB.6 ; OPA.4 5689,6018 5689,5846.39 5675,5832.39 RTest.1 5150.61,5832.39 USensor.1 ; CV51.1 5701,6871 5702,6870 5859,6870 5860,6871 CV52.1 5918,6911 5920,6913 Rboot0.2 5978.34,6582.84 5962.5,6567 ; TPS51023.4 6072.53,5732.32 6079,5725.85 6239.32,5725.85 ; C5V1.1@6239.32,5654 C5V1.1 6239.32,5725.85 ; C5V1.1@6239.35,5654 6655,5655 6654,5728 6573,5728 6512.5,5788.5 6512.5,6152 ; U1.47 6370.42,6551.42 CVMCU1.1 ; CXTAL1.1 6483.54,6257.04 6468,6241.5 6468,6153 6469,6152 6512.5,6152 ; U1.35 6581.42,6759.58 v1@6594.92,6746.08 ; v1(6595,6746) v1@6594.92,6746.08 ; U1.8 6699.53,6532 6674.28,6557.25 6674.28,6639.72 6581.42,6732.58 v1@6594.92,6746.08 ; U1.23 6911.58,6728.58 6954,6771 v1(6954,7003) ; CXTAL2.1 6861.96,6189.96 6824,6152 6512.5,6152 ; Flash.4 7344.16,6320 7326.66,6337.5 Creset1.1 7353,6515 7360,6522 7360,6734 7048,7046 PDebug.1 8774.58,7097 ; U2.5 8372,5375 8526,5529 8526,6349.5 8610.5,6434 8624,6434 8642,6452 8650,6452 8672.43,6474.43 8672.43,6551.57 PLcd.26 ; PLcd.27 8774.58,6736.58 8774.58,7097 ; SWReset.4 SWReset.3 8774.58,7097 ; 5082.05,6529 5082.05,6327.45 5172,6237.5 5172,6125 5159.5,6112.5 5118,6112.5 5068,6062.5 5068,5967 5082,5953 5082,5863 USensor.1 ; 5082.05,6529 5084.05,6531 5137,6531 5353,6531 5456.45,6634.45 VR1.1 5587.55,6634.45 5655,6567 CV332.1 CV331.1 CV333.1 5962.5,6567 ; 5962.5,6567 6294,6567 6294,6583 6297,6586 v1(6311,6586) CVMCU1.1 ; 6239.32,5725.85 R5V2.1 C5V2.1 6189,5950.32 6189,6244 6175,6258 6121.68,6258 Rsensor2.1 6150,6293 6311,6454 CVMCU1.1
  Bottom Layer w11.81: MicroUSB.7 MicroUSB.6 ; MicroUSB.9 5146,7047.7 5150.72,7052.42 MicroUSB.8 ; v1(6311,6586) 6406,6681 ; v1(6595,6746) 6452,6746 6406.16,6700.16 ; PDebug.1 v1(6954,7003) 6833.72,6882.72 6762.15,6882.72 6639.06,6759.63 6457.87,6759.63 6406.16,6707.92 6406.16,6700.16 ; PLcd.26 PLcd.27 ; 6406,6681 6406.16,6681.16 6406.16,6700.16 ; 6406,6681 6406,6700 6406.16,6700.16
GND_4096: 4096.3 4096.9 C40961.1 C40962.1 C40963.1 C40964.1 R40961.1 R40963.1 U4096IN.1 U4096IN.2 U4096OUT.3 | length 5952.6
  Top Layer w25.98: U4096IN.1 5566,7938 5640.34,7863.66 R40961.1 ; R40963.1 5991.34,7876.85 R40961.1 ; 4096.3 6972,8048 6974,8046 6974,7922 ; v3(6918,7930) 6966,7930 6974,7922 ; v3(7082,7606) 7082,7690.34 C40963.1 ; C40964.1 C40963.1 ; U4096OUT.3 8700.36,8161.64 8700.36,8040.83 8627.9,7968.36 8162.9,7968.36 7971.96,7777.43 7458.54,7777.43 7431.12,7750 7022,7750 6974,7798 6974,7922 ; R40961.1 6082.92,7863.66 ; 6082.92,7863.66 cw(c6082.92,7763.66) 6101.35,7861.95 ; 6082.92,7863.66 6101.35,7861.95 ; 6101.35,7861.95 cw(c6082.92,7763.66) 6120.51,7856.33 ; 6101.35,7861.95 6120.51,7856.33 ; 6120.51,7856.33 cw(c6082.92,7763.66) 6138.17,7847.01 ; 6120.51,7856.33 6138.17,7847.01 ; 6138.17,7847.01 cw(c6082.92,7763.66) 6153.63,7834.37 ; 6138.17,7847.01 6153.63,7834.37 ; 6153.63,7834.37 6208.71,7779.29 ; 6208.71,7779.29 ccw(c6279.42,7850) 6224.17,7766.65 ; 6208.71,7779.29 6224.17,7766.65 ; 6224.17,7766.65 ccw(c6279.42,7850) 6241.83,7757.34 ; 6224.17,7766.65 6241.83,7757.34 ; 6241.83,7757.34 ccw(c6279.42,7850) 6260.99,7751.71 ; 6241.83,7757.34 6260.99,7751.71 ; 6260.99,7751.71 ccw(c6279.42,7850) 6279.42,7750 ; 6260.99,7751.71 6279.42,7750 ; 6279.42,7750 C40961.1@6500.11,7750 ; C40961.1@6500.11,7750 ccw(c6500.11,7768.23) C40961.1 ; C40961.1@6500.11,7750 C40961.1 ; C40961.1 C40962.1 6793,7753 6873,7697 C40963.1
  Bottom Layer w25.98: U4096IN.1 U4096IN.2 ; v3(6918,7930) 6918,7666 6982,7602 7078,7602 v3(7082,7606)
  other v2: 5823,7395 6199,7395 6342,7395 5656,7406 5460,7418 5843,7477 5305,7500 6080,7542 5208,7620 6173,7620 6246,7646 8645,7803 5424,7834 7046,7957 8813,7972 5715,7984 5422,8014 7016,8025 6952,8032 6818,8062 6985,8080 5647,8087 6945,8115 7019,8117 5417,8164 6986,8171 8814,8213 5094,8388 5281,8393 5458,8483
  other v3: 5480,7514 5689,7551 5530,7689 5402,7691 5805,8035 5345,8095 5535,8123 5753,8161 5404,8398 5115,8460 5713,8472
LED: RLED2.1@6613,5692.95 U1.4 | length 999.4
  Top Layer w5: RLED2.1@6613,5692.95 6579,5692.95 6449,5822.95 6449,6317.5 6462.5,6331 6551.79,6331 6621.39,6400.6 6621.39,6470.38 6620.79,6470.98 U1.4
MCURESET: Creset1.2 Rset1.1 SWReset.1 SWReset.2 U1.7 | length 3663.4
  Top Layer w5: U1.7 6679.84,6411.16 6716,6375 v1(6972,6375) ; v1(7110.34,6375) 7209.34,6474 Creset1.2 7209.34,6528 7178,6528 7177,6529 ; Rset1.1 7325.66,6668.84 7312.5,6682 7178,6682 7177,6681 7177,6529 ; SWReset.2 SWReset.1 7097.05,7239.05 7009,7151 7009,7032 7141,6900 7141,6565 7177,6529
  Bottom Layer w5: v1(6972,6375) v1(7110.34,6375)
MISO: Flash.2 PLcd.29 U1.16 | length 3269.9
  Top Layer w5: U1.16 6881.63,6590.79 7051,6421.42 7051,6312.5 7068.5,6295 7249,6295 7324,6220 7350,6220 ; v1(7090,6849) 7090,6355 7091,6354 7216,6354 7350,6220 ; Flash.2 7350,6220
  Bottom Layer w5: v1(7090,6849) 8675,6849 PLcd.29
MOSI: Flash.5 PLcd.30 U1.17 | length 2419.5
  Top Layer w5: U1.17 6878,6610.47 7029.35,6459.13 7074,6459.13 ; v1(7057,6793) 7074,6776 7074,6459.13 ; Flash.5 7087.5,6320 7074,6333.5 7074,6459.13
  Bottom Layer w5: v1(7057,6793) PLcd.30
NC: PLcd.22 PLcd.28 PLcd.32 | length 578.6
  Top Layer w5: PLcd.22 8686.84,6448.84 8686.84,6637.16 PLcd.28 8592,6732 8592,6854 PLcd.32
Net4096_2: 4096.2 R40961.2 | length 1106.1
  Top Layer w25.98: R40961.2 6012.87,7738 v3(6097,7738) ; v3(6743,8090) 6751,8098 4096.2
  Bottom Layer w25.98: v3(6097,7738) 6100,7741 6173,7741 6276,7844 6276,8003 6363,8090 v3(6743,8090)
Net4096_6: 4096.6 LED2.K | length 883.4
  Top Layer w25.98: 4096.6 7174,8048 v3(7195,8069) ; v3(7333,7960) 7333,7901 v3(7409,7825) ; v3(7475,7580) 7475,7729.43 LED2.K
  Bottom Layer w25.98: v3(7195,8069) 7224,8069 v3(7333,7960) ; v3(7409,7825) 7409,7646 v3(7475,7580)
Net4096_7: 4096.7 LED1.K | length 1280.9
  Top Layer w25.98: 4096.7 7118.39,8098 7279.14,8258.74 7279.14,8343.01 7438.7,8502.57 7525.3,8502.57 7536.43,8491.45 7536.43,8218.64 7481.69,8163.9 LED1.K
Net4096_8: 4096.8 R40964.1 | length 596.2
  Top Layer w25.98: 4096.8 7101.11,8210.96 7468.81,8578.66 R40964.1
NetL1_2: L1.2 TPS51023.5 | length 599.5
  Top Layer w5: L1.2@5857,5397.25 L1.2 L1.2@5897.25,5499.75
  Top Layer w11: TPS51023.5 5808,5752 5800,5744 5800,5586 5857,5529 L1.2@5857,5397.25
NetLED1_A: LED1.A RLED1.1@7858.68,7869 | length 325.1
  Top Layer w25.98: LED1.A 7563.43,7869 RLED1.1@7858.68,7869
NetLED2_A: LED2.A RLED2.1@7864.68,7698 | length 338.1
  Top Layer w25.98: LED2.A 7826.57,7736.11 RLED2.1@7864.68,7698
NetOPA_1: OPA.1 OPA.2 Rsensor1.1 | length 506.1
  Top Layer w5: OPA.2 OPA.1 5778,6168 5805,6141 5992,6141 6023,6172 Rsensor1.1
NetOPA_3: OPA.3 RTest.2 USensor.2 | length 600.6
  Top Layer w5: USensor.2 5288,6018 5300.39,6005.61 RTest.2 5572.61,6005.61 5635,6068 OPA.3
NetP1_1: P1.1 R485.2 U2.7 | length 709.2
  Top Layer w5: U2.7 8176.5,5475 8164.14,5462.64 P1.1 8212.14,5185 8394.04,5185 8395.04,5184 R485.2
NetP1_2: P1.2 R485.1 U2.6 | length 998.9
  Top Layer w5: P1.2 8107.14,5094 8218,5094 8271,5147 R485.1 8324.96,5110 8325.96,5109 8426,5109 8427,5110 8427,5313.5 8412.5,5328 8225,5328 8210,5343 8210,5424 8211,5425 U2.6
NetPowerLED_K: PowerLED.K RLED1.1@5137,6601.08 | length 177.3
  Top Layer w5: PowerLED.K 5130.39,6685.61 5145,6671 5145,6601.08 RLED1.1@5137,6601.08
NetR5V1_1: R5V1.1 R5V2.2 TPS51023.1 | length 1136.1
  Top Layer w5: TPS51023.1 5783,5771.69 5805.31,5794 ; R5V1.1 5943,5927 5960,5944 6152,5944 6153,5943 6153,5847 6152,5846 5857.31,5846 5805.31,5794 ; R5V2.2 5808.31,5791 5805.31,5794
NetRLED2_2: RLED2.2@6613,5763.03 UserLED.K | length 111
  Top Layer w5: RLED2.2@6613,5763.03 6653,5763.03 6674.72,5741.31 UserLED.K
NTC: 4096.1 R40962.2 R40963.2 U4096OUT.2 | length 3322.3
  Top Layer w25.98: R40962.2 R40963.2 6432.2,8287 ; U4096OUT.2 8087.1,8619.9 7339.9,8619.9 6883,8163 6769.42,8163 ; 6432.2,8287 cw(c6432.2,8239.2) 6449.35,8283.82 ; 6432.2,8287 6449.35,8283.82 ; 6449.35,8283.82 cw(c6432.2,8239.2) 6466,8273 ; 6449.35,8283.82 6466,8273 ; 6466,8273 6576.58,8273 ; 6576.58,8273 cw(c6576.58,8173) 6595.01,8271.29 ; 6576.58,8273 6595.01,8271.29 ; 6595.01,8271.29 cw(c6576.58,8173) 6614.17,8265.66 ; 6595.01,8271.29 6614.17,8265.66 ; 6614.17,8265.66 cw(c6576.58,8173) 6631.83,8256.35 ; 6614.17,8265.66 6631.83,8256.35 ; 6631.83,8256.35 cw(c6576.58,8173) 6647.29,8243.71 ; 6631.83,8256.35 6647.29,8243.71 ; 6647.29,8243.71 6698.71,8192.29 ; 6698.71,8192.29 ccw(c6769.42,8263) 6714.17,8179.65 ; 6698.71,8192.29 6714.17,8179.65 ; 6714.17,8179.65 ccw(c6769.42,8263) 6731.83,8170.34 ; 6714.17,8179.65 6731.83,8170.34 ; 6731.83,8170.34 ccw(c6769.42,8263) 6750.99,8164.71 ; 6731.83,8170.34 6750.99,8164.71 ; 6750.99,8164.71 ccw(c6769.42,8263) 6769.42,8163 ; 6750.99,8164.71 6769.42,8163
OSCIN: CXTAL2.2 U1.5 Y1.2 | length 566.4
  Top Layer w5: U1.5 6640.47,6356.18 6635.29,6351 Y1.2 6695.29,6287 6839,6287 6865.96,6260.04 CXTAL2.2
OSCOUT: CXTAL1.2 U1.6 Y1.1 | length 992.9
  Top Layer w5: CXTAL1.2 6578.39,6186.96 6598.35,6167 6686,6167 6746,6227 Y1.1 6796.71,6228 6947,6228 6948,6229 6948,6313 6925,6336 6661.16,6336 6660.16,6337 U1.6
PC14: U1.3 U2.2 U2.3 | length 1970.8
  Top Layer w5: v1(6601,6430.1) 6601.1,6430.2 U1.3 ; v1(7723,5475) U2.2 U2.3
  Bottom Layer w5: v1(6601,6430.1) 6621.9,6451 6762,6451 6764,6449 6764,6434 v1(7723,5475)
PEN: PLcd.31 U1.32 | length 2425.9
  Top Layer w5: U1.32 v1(6640.47,6855)
  Bottom Layer w5: v1(6640.47,6855) 6809,7023.53 6809,7125 6824,7140 7994,7140 8202,6932 8692,6932 PLcd.31
RD: PLcd.4 U1.11 | length 2353.4
  Top Layer w5: U1.11 6758.58,6529.08 v1(6762.5,6533)
  Bottom Layer w5: v1(6762.5,6533) 7302.5,5993 8131,5993 PLcd.4
RS: PLcd.2 U1.29 | length 3749.5
  Top Layer w5: U1.29 6699.53,6835.03 6712.5,6848 v1(6797,6848) ; PLcd.2 8692,5454 v1(8838,5454)
  Bottom Layer w5: v1(6797,6848) 6891,6754 8825,6754 8845.81,6733.19 8845.81,5461.81 v1(8838,5454)
RST: PLcd.5 U1.2 | length 3607.6
  Top Layer w5: v1(6438,5745) 6438,6375 6453,6390 6562.5,6390 6580.69,6408.19 6580.69,6449.89 6581.42,6450.62 U1.2
  Bottom Layer w5: v1(6438,5745) 6829,5354 8769,5354 8770,5355 8770,5554 PLcd.5
RXD_485: U1.31 U2.1 | length 2805.1
  Top Layer w5: U1.31 6660.16,6761.84 v1(6676,6746) ; v1(7945,6822) 7945,5537.5 7957.5,5525 U2.1
  Bottom Layer w5: v1(6676,6746) 6776.69,6846.69 6776.69,6867 6778,6868.31 6969.69,6868.31 7016,6822 v1(7945,6822)
SWCLK: PDebug.2 U1.37 | length 725.3
  Top Layer w5: U1.37 6510,6748.27 6510,6936 6710,7136 6909,7136 PDebug.2
SWIO: PDebug.3 U1.34 | length 461.8
  Top Layer w5: U1.34 v1(6601.1,6853)
  Bottom Layer w5: v1(6601.1,6853) 6620.1,6834 6661,6834 6848,7021 PDebug.3
T_CS: PLcd.33 U1.14 | length 2394.3
  Top Layer w5: v1(6776,6686) 6782,6680 6783,6551.42 U1.14 ; v1(8525,6711) 8525,6930.5 8537.5,6943 8681,6943 PLcd.33
  Bottom Layer w5: v1(6776,6686) 6801,6711 v1(8525,6711)
TXD_485: U1.30 U2.4 | length 2987.2
  Top Layer w5: v1(6614,6940) 6679.84,6874.16 U1.30 ; v1(7372,5779) 7776,5375 U2.4
  Bottom Layer w5: v1(6614,6940) 6513,6940 6326,6753 6326,6630 6290.69,6594.69 6290.69,6566 7077.69,5779 v1(7372,5779)
V12V: P12.1 USensor.3 | length 675.8
  Top Layer w5: P12.1 5036,6089 USensor.3
VCC: CV331.2 CV332.2 CV333.2 CVMCU1.2 Flash.3 Flash.7 Flash.8 PDebug.4 PLcd.24 PLcd.25 Rset1.2 U1.9 U1.24 U1.36 U1.48 U2.8 UserLED.A VR1.2@5519.11,6725 | length 9002.2
  Top Layer w11.81: VR1.2@5519.11,6725 5691.5,6725 5704,6712.5 CV332.2 CV331.2 CV333.2 5936,6637.08 v1(5936,6856) ; CVMCU1.2 6381.08,6530 6382.81,6531.73 U1.48 6630.74,6531.73 6656.47,6557.46 6656.47,6610.87 6561.73,6705.61 U1.36 6561.73,6949.73 6709,7097 PDebug.4 6788,7097 6830,7055 6830,6748.27 U1.24 6773.27,6748.27 6766,6741 6766,6710 6752.28,6696.28 6752.28,6675.97 6765.25,6663 6765.25,6615 6719.21,6568.96 U1.9 6719.21,6408 6720.93,6406.28 6992.84,6406.28 7011.62,6387.5 7011.62,6213.88 7055.5,6170 ; UserLED.A 6747,5680.68 6951,5884.68 6951,6150 6971,6170 7055.5,6170 ; Flash.7 Flash.8 ; Rset1.2 7208.34,6613 7266,6555.34 7266,6330 7326,6270 Flash.3 7464.27,6270 7484.27,6250 7484.27,6162.5 7461.74,6139.97 7172.03,6139.97 7170,6142 ; U2.8 U2.8@8254,5525 ; PLcd.24 8254,6116 U2.8@8254,5525 ; 7055.5,6170 Flash.8 ; Flash.8 7170,6170 7170,6142 ; 7170,6142 7170,5699 7532,5337 8110,5337 8123,5350 8123,5525 U2.8@8254,5525
  Bottom Layer w11.81: v1(5936,6856) 6177,7097 PDebug.4 ; PLcd.24 PLcd.25
WR: PLcd.3 U1.12 | length 2441.9
  Top Layer w5: U1.12 6778.27,6446 6787,6446 v1(6799,6434)
  Bottom Layer w5: v1(6799,6434) 7790,5443 8712.5,5443 8731,5461.5 PLcd.3
pads on no net: MicroUSB. MicroUSB.2 MicroUSB.3 OPA.5 OPA.6 OPA.7 U1.1 VR1.2@5282.89,6725

## Polygon pours and split planes (outlines as drawn)
GND_4096 on Top Layer "Top Layer-No Net" (solid, pour order 14): 8581,8276 8822,8276 8842,8256 8842,7790 8578,7790 8569,7799
GND_4096 on Top Layer "Top Layer-No Net" (solid, pour order 12): 6794,8201 6995,8201 6995,7954 6986,7945 6821,7945
GND_4096 on Top Layer "Top Layer-No Net" (solid, pour order 10): 6941,8181 7064,8181 7076,8169 7076,7965 6904,7965 6900,7961
GND_4096 on Top Layer "Top Layer-No Net" (solid, pour order 2): 5059,8529 6329,8529 6388,8470 6388,7362 5269,7362 5039,7592
4096_5V on Bottom Layer "Top Layer-No Net" (solid, pour order 8): 7656,8305 7660,8301 8138,8301 8138,8105 8096,8063 7676,8063
4096_5V on Bottom Layer "Top Layer-No Net" (solid, pour order 6): 6407,8711 7094,8711 7091,8708 7091,8560 6415,8560 6412,8563

## Silkscreen, mask and mechanical layers (free items; w line width, h text height)
Top Overlay:
  text "CS" at 8827,5372 h30 r90
  text "Chen Xufeng 2020/06/26" at 5026,4940 h30
Mechanical 12:
  circle w0.5: c8696.9,5092.51 r59.06
  circle w0.5: c5153.59,5092.51 r59.06
  circle w0.5: c8696.9,8635.82 r59.06
  circle w0.5: c5153.59,8635.82 r59.06
  lines w0.5: 4956.74,4974.4 ccw(c5035.48,4974.4) 5035.48,4895.66 8815.01,4895.66 ccw(c8815.01,4974.4) 8893.75,4974.4 8893.75,8753.93 ccw(c8815.01,8753.93) 8815.01,8832.67 5035.48,8832.67 ccw(c5035.48,8753.93) 4956.74,8753.93 4956.74,4974.4

## Text inside footprints (layer, text, board x,y; h text height)
PLcd: Top Overlay "2" at 8651,5273 h31.5 r90; Top Overlay "1" at 8751,5273 h31.5 r90; Top Overlay "33" at 8751,7053 h31.5 r90; Top Overlay "34" at 8651,7053 h31.5 r90